# Altium PCB fab.PcbDoc
Units mm, origin at the board's own origin, x right, y up, seen from the top; angles counter-clockwise.
Board outline 42.75 x 16.25 mm, 2 copper layers (Top Layer, Bottom Layer), stack 0.325 mm thick; 15 components, 18 nets, 82 pads, 15 vias.
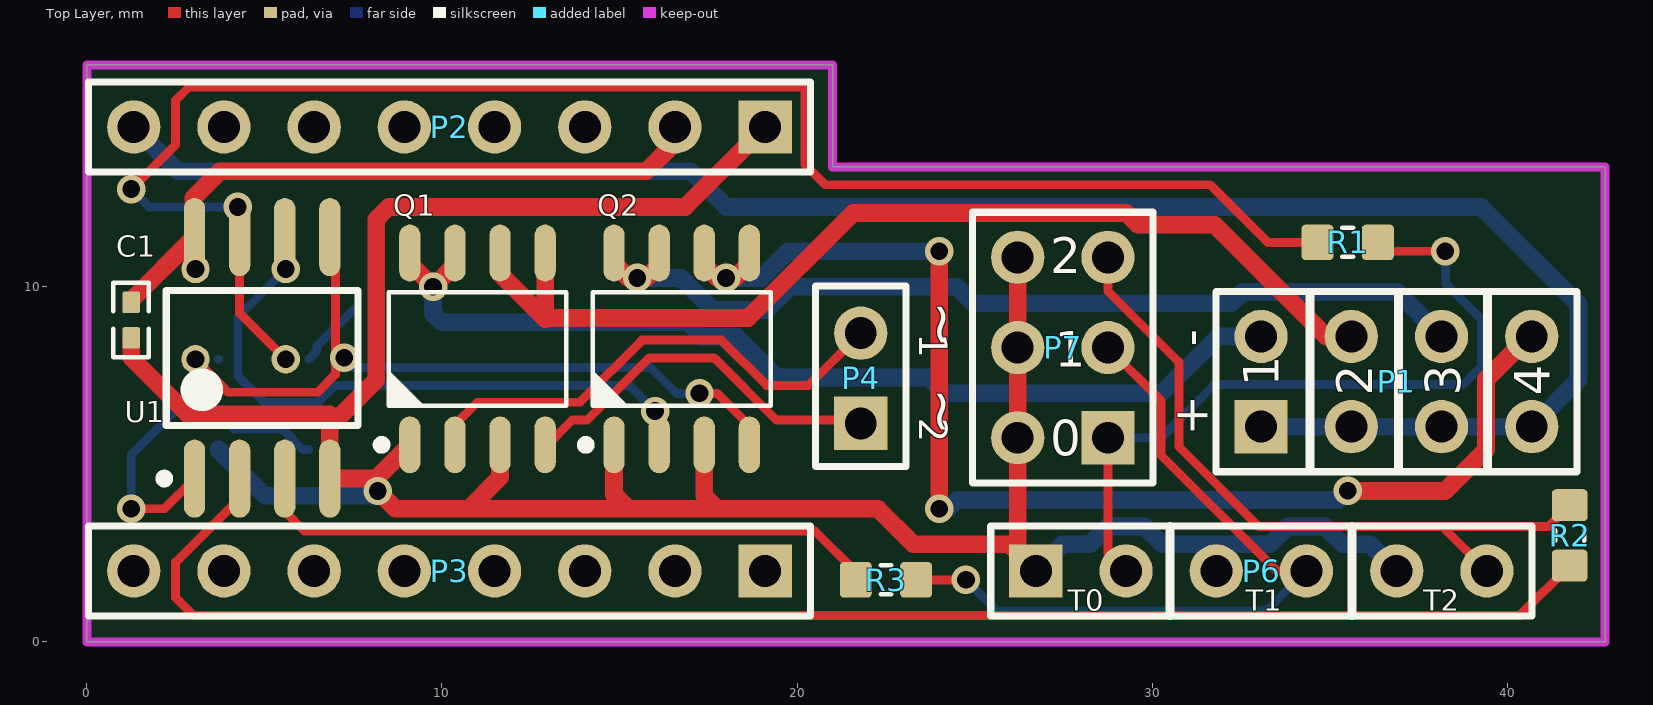
[diagram p0: Top Layer view]
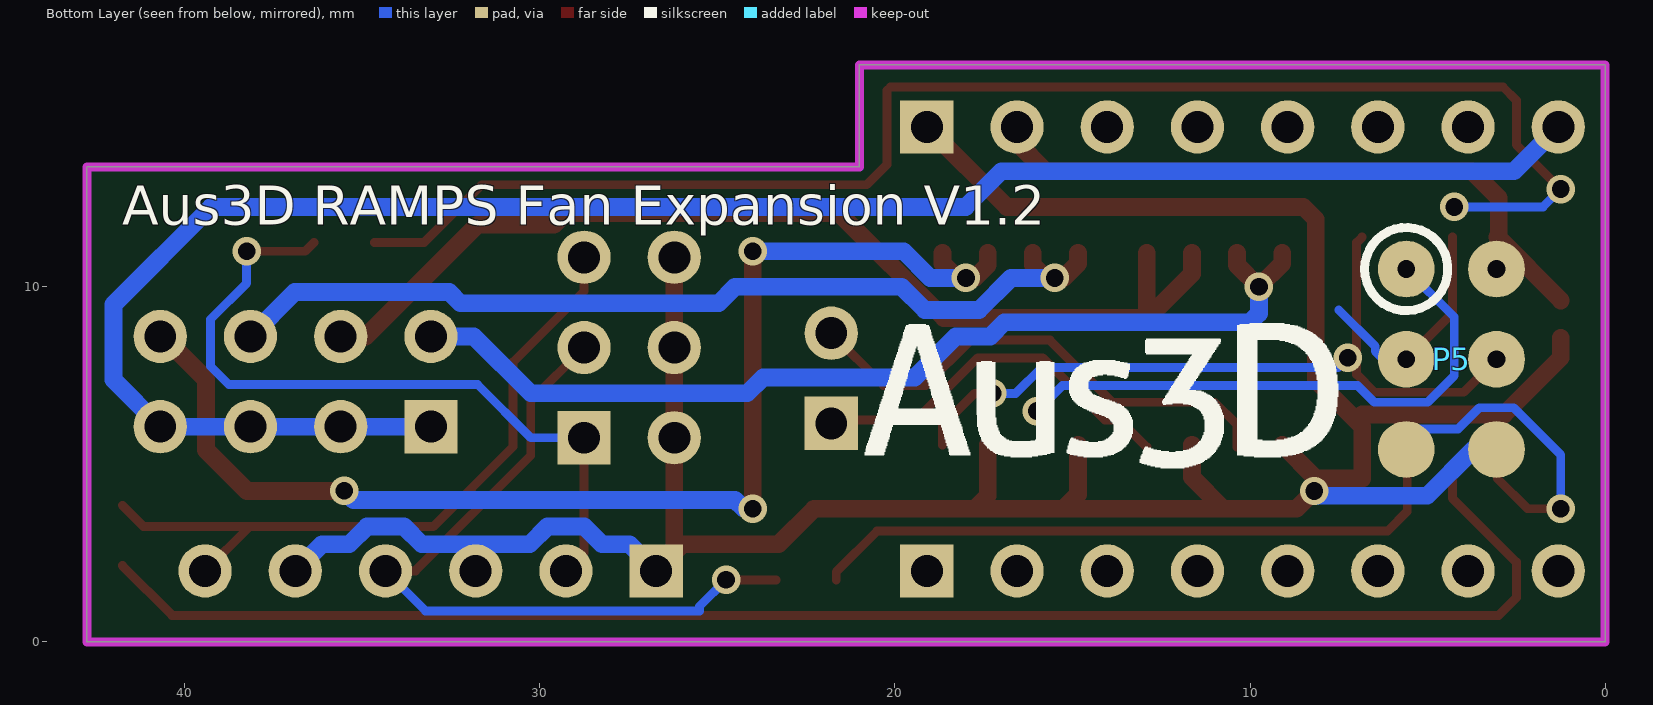
[diagram p1: Bottom Layer view, seen from below]

## Layer stack, top to bottom
Top Solder: solder mask 0.0102, Solder Resist, Dk 3.5
Top Layer: signal copper 0.0356
Dielectric 1: core 0.254, FR-4, Dk 4.2
Bottom Layer: signal copper 0.0356
Solder Side: solder mask 0.0102, Solder Resist, Dk 3.5

## Board outline
0,0 0,16.25 21,16.25 21,13.375 42.75,13.375 42.75,0

## Design rules (kind name [scope] priority, off if disabled: settings)
Clearance [All] p1: gap=0.25
ComponentClearance [All] p1: gap=0.25 collisioncheckmode=3 verticalgap=0.254 showdistances=FALSE
FabricationTestPointUsage TestPointUsage [All] p1: valid=0 allowmultiple=FALSE
FabricationTestpoint Testpoint [All] p1: side=3 testpointundercomponent=TRUE minsize=1.016 maxsize=2.54 preferedsize=1.524 minholesize=0 maxholesize=1.016 preferedholesize=0.813 testpointgrid=0.025 allowsidetop=TRUE allowsidebottom=TRUE usegrid=TRUE gridtolerance=0
PolygonConnect [All] p1: connectstyle=Relief reliefconductorwidth=0.25 reliefentries=4 polygonreliefangle="90 Angle" airgapwidth=0.25
RoutingVias [All] p1: holewidth=0.6 width=1 viastyle="Through Hole" minholewidth=0.6 minwidth=1 maxholewidth=0.6 maxwidth=1
SilkToSolderMaskClearance SilkscreenOverComponentPads [IsPad] p1: minsilkscreentomaskgap=0.254 clearancetoexposedcopper=TRUE
SolderMaskExpansion [All] p1: expansion=0.102
Width Width_Power [(InNet('5V') OR InNet('12V') OR InNet('GND') OR InNet('FAN1') OR InNet('FAN2') OR InNet('FAN3') OR InNet('FAN4'))] p1: maxlimit=0.5 minlimit=0.5 preferedwidth=0.5
Width [All] p2: maxlimit=0.25 minlimit=0.25 preferedwidth=0.25 minimp=50.000000 maximp=50.000000 favimp=50.000000
26 further rules are at their usual default settings.

## Classes and differential pairs
component class fab: C1 P1 P2 P3 P4 P5 P6 P7 Q1 Q2 R1 R2 R3 U1

## Components (designator, comment, footprint, x,y, rotation, side; value= is the part's Value field where it differs from the comment)
C1 "100n" CAPC1005X55N 1.25,9.062 r90 top
P1 "Fans" HDR2X4 33.063,6.062 r0 top
P2 "Header 8" HDR1X8 19.1,14.5 r180 top
P3 "Header 8" HDR1X8 19.1,2 r180 top
P4 "Header 2" HDR1X2 21.79,6.21 r90 top
P5 "ICSP" "ICSP Pads - SMD" 5.6,10.5 r180 bottom
P6 "Thermistor Pins" HDR1X6 26.72,2 r0 top
P7 "Header 3X2" HDR2X3 28.75,5.75 r90 top
Q1 "MOSFET_AO4818B" SOIC127P600X175-8AN 11,8.25 r90 top
Q2 "MOSFET_AO4818B" SOIC127P600X175-8AN 16.75,8.25 r90 top
R1 "Thick Film" RESC1608X55N 35.5,11.25 r0 top
R2 "Thick Film" RESC1608X55N 41.75,3 r90 top
R3 "Thick Film" RESC1608X55N 22.5,1.75 r0 top
U1 "ATtiny45-20SU" 8S2_N 4.938,8 r90 top
? "" AUS3D-LOGO-BACK 14.5,6.75 r0 top

## Footprints (in the part's own frame and the unit in brackets; to place one, negate y for a bottom-side part, rotate by r counter-clockwise, add the part's x,y. Pads: shape width x height; smd on the part's side, far side on the other; paste and mask are expansions set on the pad)
8S2_N [mm] "SOP, 8-Leads, Body 5.3x5.3mm, Pitch 1.27mm, IPC Medium Density"
  oval 2.2x0.6 smd: 1(-3.4,1.905) 2(-3.4,0.635) 3(-3.4,-0.635) 4(-3.4,-1.905) 5(3.4,-1.905) 6(3.4,-0.635) 7(3.4,0.635) 8(3.4,1.905)
  silkscreen extent -3.52,-2.7 1.9,2.88, body extent -2.7,-2.68 2.7,2.68, height 2.16
AUS3D-LOGO-BACK [mm]
CAPC1005X55N [mm] "Chip Capacitor, Body 1.0x0.5mm, EIA 0402, IPC Medium Density"
  round 0.2 on Mech15: 0(0,0)
  rrect20% 0.6x0.5 smd: 1(-0.5,0) 2(0.5,0)
  Top Layer pour cut-out: -0.325,0.375 -0.2,0.5 0.2,0.5 0.325,0.375 0.325,-0.375 0.2,-0.5 -0.2,-0.5 -0.325,-0.375
  silkscreen extent -1.05,-0.5 1.05,0.5, body extent -0.52,-0.27 0.53,0.28, height 0.55
HDR1X2 [mm] "Connector; Header; 2 Position"
  rect 1.5x1.5 hole 0.9: 1(-0.055,0)
  round 1.5 hole 0.9: 2(2.485,0)
  silkscreen extent -1.27,-1.27 3.81,1.27
HDR1X6 [mm] "Connector; Header; 6 Position"
  rect 1.5x1.5 hole 0.9: 1(0,0)
  round 1.5 hole 0.9: 2(2.54,0) 3(5.08,0) 4(7.62,0) 5(10.16,0) 6(12.7,0)
  silkscreen extent -1.27,-1.27 13.97,1.27
HDR1X8 [mm] "Connector; Header; 8 Position"
  rect 1.5x1.5 hole 0.9: 1(0,0)
  round 1.5 hole 0.9: 2(2.54,0) 3(5.08,0) 4(7.62,0) 5(10.16,0) 6(12.7,0) 7(15.24,0) 8(17.78,0)
  silkscreen extent -1.27,-1.27 19.05,1.27
HDR2X3 [mm] "Connector; Header; 3x2 Position"
  rect 1.5x1.5 hole 0.9: 1(0,0)
  round 1.5 hole 0.9: 2(0,2.54) 3(2.54,0) 4(2.54,2.54) 5(5.08,0) 6(5.08,2.54)
  silkscreen extent -1.27,-1.27 6.35,3.81
HDR2X4 [mm] "Connector; Header; 4x2 Position"
  rect 1.5x1.5 hole 0.9: 1(0,0)
  round 1.5 hole 0.9: 2(0,2.54) 3(2.54,0) 4(2.54,2.54) 5(5.08,0) 6(5.08,2.54) 7(7.62,0) 8(7.62,2.54)
  silkscreen extent -1.27,-1.27 8.89,3.81
"ICSP Pads - SMD" [mm]
  round 1.6 / inner round 1.6 / far side round 0.8 hole 0.5: 0(0,0) 1(2.54,0) 2(0,-2.54) 3(2.54,-2.54)
  round 1.6 smd: 4(0,-5.08) 5(2.54,-5.08)
  silkscreen extent -1.17,-1.17 1.17,1.17
RESC1608X55N [mm] "Chip Resistor, Body 1.6x0.8mm, EIA 0603, IPC Medium Density"
  round 0.254 on Mech15: 0(0,0)
  rrect25% 0.9x1 smd: 1(-0.85,0) 2(0.85,0)
  Top Layer pour cut-out: -0.6,0.5 -0.4,0.7 0.4,0.7 0.6,0.5 0.6,-0.5 0.4,-0.7 -0.4,-0.7 -0.6,-0.5
  silkscreen extent -0.15,-0.41 0.15,0.41, body extent -0.87,-0.47 0.88,0.48, height 0.54
SOIC127P600X175-8AN [mm] "SOIC, 8-Leads, Body 4.9x3.9mm, Pitch 1.27mm, IPC Medium Density"
  round 1 on Mech15: 0(0,0)
  oval 1.6x0.6 smd: 1(-2.7,1.905) 2(-2.7,0.635) 3(-2.7,-0.635) 4(-2.7,-1.905) 5(2.7,-1.905) 6(2.7,-0.635) 7(2.7,0.635) 8(2.7,1.905)
  silkscreen extent -2.82,-2.5 1.6,2.82, body extent -3,-2.45 3,2.45, height 1.75

## Part data
C1: library part CAPC_100n_0402_X5R_16V_10%, "Capacitor SMD Cer 100nF 10% 16V X5R 0402"
P1: library part "Header 4X2", "Header, 4-Pin, Dual row"
P2 P3: "Header, 8-Pin"
P4: "Header, 2-Pin"
P5: library part "Header 3X2", "Header, 3-Pin, Dual row"
P6: library part "Header 6", "Header, 6-Pin"
P7: "Header, 3-Pin, Dual row"
Q1 Q2: "MOSFET Dual-Channel 30V 8.5A SOIC-8 SMD"
R1 R2 R3: library part RES_10K_0603_1%, "Resistor SMD chip 10k Ohm 0.1W 1% 0603"
U1: "8-bit AVR Microcontroller, 20MHz, 2.7-5.5V, 4K Flash, 256 Bytes EEPROM, 256 Bytes SRAM, Industrial Grade (-40°C to 85°C), 8-Lead SOIC, Pb-Free"

## Via types
v1: diameter 0.8, hole 0.5, Top Layer to Bottom Layer, 15 vias

## Nets (pads, with @x,y where several pads share a name; then routed paths per layer and width w, separated by ;. In a path a pad name is that pad's centre, name@x,y a point inside that pad or via, vN(x,y) a via of type N, cw(c..) or ccw(c..) an arc to the next point about the centre after c; other vN are vias at no path point)
5V: C1.2 P2.2 P5.1 U1.8 | length 18.3
  Top Layer w0.5: C1.2@1.25,9.618 U1.8 3,11.433 3,12.5 3.75,13.25 15.75,13.25 16.56,14.06 P2.2
12V: P1.1 P1.3 P1.5 P1.7 P2.8 | length 54.4
  Bottom Layer w0.5: P2.8 2.57,13.25 17,13.25 18,12.25 39.25,12.25 42,9.5 42,7.38 P1.7 P1.5 P1.3 P1.1
FAN1: P1.2 Q1.7 Q1.8 | length 28.1
  Top Layer w0.5: Q1.8 9.095,10.655 v1(9.75,10) 10.365,10.615 Q1.7
  Bottom Layer w0.5: v1(9.75,10) 9.75,9.25 10,9 16.916,9 17.317,8.6 18.284,8.6 19.439,7.445 23.707,7.445 24.152,7 25.692,7 26.728,7 27.793,7 29.707,7 30.25,7 31.853,8.603 P1.2
FAN1_PWM: P4.2 Q1.2 | length 14.2
  Top Layer w0.25: Q1.2@10.365,5.488 10.365,6.115 11,6.75 13.883,6.75 15.633,8.5 17.867,8.5 19.142,7.225 20.32,7.225 P4.2
FAN2: P1.4 Q1.5 Q1.6 | length 29.6
  Top Layer w0.5: Q1.6 11.635,10.365 12.905,9.095 Q1.5 ; 12.905,9.125 18.625,9.125 21.58,12.08 29.268,12.08 29.598,11.75 31.75,11.75 34.897,8.603 P1.4
FAN2_PWM: P4.1 Q1.4 | length 10.7
  Top Layer w0.25: Q1.4@12.905,5.488 13.668,6.25 14.09,6.25 15.84,8 17.66,8 19.41,6.25 21.695,6.25 P4.1
FAN3: P1.6 Q2.7 Q2.8 | length 26.3
  Top Layer w0.5: Q2.8 14.845,10.655 15.25,10.25 v1(15.5,10.25) 15.75,10.25 16.115,10.615 Q2.7
  Bottom Layer w0.5: v1(15.5,10.25) 16.727,10.25 17.627,9.35 19.161,9.35 19.811,10 24.5,10 24.96,9.54 32.232,9.54 32.545,9.853 36.893,9.853 P1.6
FAN3_PWM: P5.0 Q2.2 U1.6 | length 16.1
  Bottom Layer w0.25: P5.0 4.25,9.15 4.25,7.5 5,6.75 6.5,6.75 6.975,7.225 15.275,7.225 v1(16,6.5)
FAN4: P1.8 Q2.5 Q2.6 | length 35.4
  Top Layer w0.5: Q2.6 17.385,10.615 17.75,10.25 v1(18,10.25) 18.25,10.25 18.655,10.655 Q2.5 ; v1(24,3.75) v1(24,11) ; v1(35.5,4.26) 35.51,4.25 38.24,4.25 39.393,5.402 39.393,7.393 40.603,8.603 P1.8
  Bottom Layer w0.5: v1(18,10.25) 19,10.25 19.75,11 v1(24,11) ; v1@24.25,3.75 24.5,4 35.24,4 v1(35.5,4.26)
FAN4_PWM: P5.3 Q2.4 U1.5 | length 21.2
  Top Layer w0.25: P5.3 3.987,7.033 6.5,7.033 7,7.533 7,11.243 U1.5 ; v1(17.25,7) 17.75,7 18.655,6.095 Q2.4
  Bottom Layer w0.25: v1(7.25,8) 7.525,7.725 15.871,7.725 16.596,7 v1(17.25,7)
GND: C1.1 P2.1 P5.5 P6.1 P6.3 P6.5 P7.2 P7.4 P7.6 Q1.1 Q1.3 Q2.1 Q2.3 U1.4 | length 80.6
  Top Layer w0.5: C1.1 1.25,8 2.842,6.408 6.842,6.408 ; v1(8.193,4.25) 8.693,3.75 10.75,3.75 ; Q1.1 8.145,4.6 U1.4 6.842,6.067 8.15,7.375 8.15,11.9 8.5,12.25 16.85,12.25 P2.1 ; Q1.3 11.635,4.635 10.75,3.75 ; Q2.1 14.845,4.155 15.25,3.75 ; Q2.3 17.385,4.115 17.75,3.75 ; P7.6 P7.4 P7.2 26.21,2.51 P6.1 25.97,2.75 23.273,2.75 22.273,3.75 17.75,3.75 ; 10.75,3.75 15.25,3.75 ; 15.25,3.75 17.75,3.75
  Bottom Layer w0.5: P5.5@3.71,5.42 5.01,4.12 8.063,4.12 v1(8.193,4.25) ; P6.1 27.47,2.75 28.242,2.75 28.742,3.25 29.778,3.25 30.278,2.75 33.322,2.75 33.822,3.25 34.858,3.25 35.358,2.75 36.13,2.75 P6.5
NetR2_1: R2.1 U1.2 | length 44.1
  Top Layer w0.25: U1.2 4.302,4.052 2.5,2.25 2.5,1.25 3,0.75 40.35,0.75 R2.1
NetR3_1: R3.1 U1.3 | length 17.9
  Top Layer w0.25: U1.3 5.572,3.678 6.125,3.125 20.5,3.125 21.65,1.975 R3.1
RESET: P5.4 U1.1 | length 9.7
  Top Layer w0.25: v1(1.25,3.75) 2.182,3.75 U1.1
  Bottom Layer w0.25: v1(1.25,3.75) 1.25,5.272 2.573,6.595 3.547,6.595 4.142,6 5.5,6 6.08,5.42 P5.4@6.25,5.42
SCK: P5.2 R1.1 U1.7 | length 47.4
  Top Layer w0.25: v1(1.25,12.75) 2.5,14 2.5,15.248 2.877,15.625 20.123,15.625 20.225,15.523 20.225,13.44 20.792,12.873 31.627,12.873 33.25,11.25 R1.1 ; U1.7 4.302,9.257 P5.2
  Bottom Layer w0.25: v1(1.25,12.75) 1.75,12.25 v1(4.25,12.25) ; P5.2@6.25,7.96 6.475,8.185 6.475,8.321 7.5,9.346
THERM0: P6.2 P7.1 R1.2 | length 21
  Top Layer w0.25: P7.1 28.75,2.51 P6.2 ; R1.2 36.6,11 v1(38.25,11)
  Bottom Layer w0.25: P7.1 30.25,5.75 31.75,7.25 38.75,7.25 39.268,7.768 39.268,9.086 38.25,10.104 v1(38.25,11)
THERM1: P6.4 P7.3 R3.2 | length 21
  Top Layer w0.25: R3.2 v1(24.75,1.75) ; P7.3 30.25,6.79 30.25,5.25 33.5,2 P6.4
  Bottom Layer w0.25: v1(24.75,1.75) 25.5,1 25.5,0.875 33.215,0.875 P6.4
THERM2: P6.6 P7.5 R2.2 | length 20.1
  Top Layer w0.25: P7.5 28.75,9.881 30.75,7.881 30.75,5.5 33,3.25 38.17,3.25 ; P6.6 38.17,3.25 ; R2.2 41.15,3.25 38.17,3.25
pads on no net: C1.0 P2.3 P2.4 P2.5 P2.6 P2.7 P3.1 P3.2 P3.3 P3.4 P3.5 P3.6 P3.7 P3.8 Q1.0 Q2.0 R1.0 R2.0 R3.0

## Keep-outs
Keep-Out Layer:
  the board outline again, w0.254

## Silkscreen, mask and mechanical layers (free items; w line width, h text height)
Top Overlay:
  lines w0.254: 30.5,0.75 30.5,3.25 ; 34.438,4.812 34.438,9.812 ; 35.625,0.75 35.625,3.25 ; 36.937,4.812 36.937,9.812 ; 39.437,4.812 39.437,9.812
  text "2" at 27.125,10.375 h1
  text "1" at 23.437,8.688 h0.8 r270
  text "-" at 31.563,8.312 h1 r90
  text "~" at 24.937,8.25 h2 r90
  text "1" at 27.25,7.75 h1
  text "1" at 33.563,7.187 h1 r90
  text "2" at 36.188,6.937 h1 r90
  text "3" at 38.688,6.937 h1 r90
  text "4" at 41.188,6.937 h1 r90
  text "2" at 23.437,6.313 h0.8 r270
  text "~" at 24.937,5.813 h2 r90
  text "+" at 31.563,5.812 h1 r90
  text "0" at 27.125,5.25 h1
  text "T0" at 27.625,0.875 h0.6
  text "T1" at 32.625,0.875 h0.6
  text "T2" at 37.625,0.875 h0.6
Bottom Overlay:
  text "Aus3D RAMPS Fan Expansion V1.2" at 41.75,11.75 h1.1
Mechanical 16:
  drawing of 1874 lines, arcs and shapes, not listed
  text "1" at -98.754,84.611 h1.78
  text "2" at -26.11,84.611 h1.78
  text "3" at 47.042,84.611 h1.78
  text "4" at 119.94,84.611 h1.78
  text "A" at -133.095,61.599 h1.78
  text "A" at 153.925,61.599 h1.78
  text "B" at -133.095,13.542 h1.78
  text "B" at 153.925,13.542 h1.78
  text "C" at -133.095,-34.972 h1.78
  text "C" at 153.925,-34.972 h1.78
  text "ENGINEER:" at 38.99,-71.98 h1.14
  text "TITLE:" at 77.09,-71.98 h1.14
  text "PCB DESIGNER:" at 38.99,-79.473 h1.14
  text "D" at -133.095,-82.978 h1.78
  text "D" at 153.925,-82.978 h1.78
  text "DATE:" at 38.99,-87.22 h1.14
  text "PART NO.:" at 77.09,-87.22 h1.14
  text "REV:" at 130.43,-87.22 h1.14
  text "Altium Limited" at 5.97,-89.76 h1.78
  text ".PRINT_DATE" at 40.26,-90.268 h1.78
  text "12a Rodborough Rd" at 5.97,-92.3 h1.78
  text "Frenchs Forest" at 5.97,-94.84 h1.78
  text "FILE NAME:" at 38.99,-94.84 h1.14
  text "DWG NO:" at 77.09,-94.84 h1.14
  text "SCALE:" at 130.43,-94.84 h1.14
  text "NSW 2086" at 5.97,-97.38 h1.78
  text ".PCB_FILE_NAME_NO_PATH" at 40.26,-97.888 h1.78
  text "1" at -98.754,-103.349 h1.78
  text "2" at -26.11,-103.349 h1.78
  text "3" at 47.042,-103.349 h1.78
  text "4" at 119.94,-103.349 h1.78